# Altium PCB Feather_nRF53.PcbDoc
Units mm, origin at the board's own origin, x right, y up, seen from the top; angles counter-clockwise.
Board outline 22.88 x 50.82 mm, 2 copper layers (Top Layer, Bottom Layer), stack 1.569 mm thick; 6 components, 9 nets, 107 pads, 0 vias.
Unrouted connection lines stored in the file: 13.
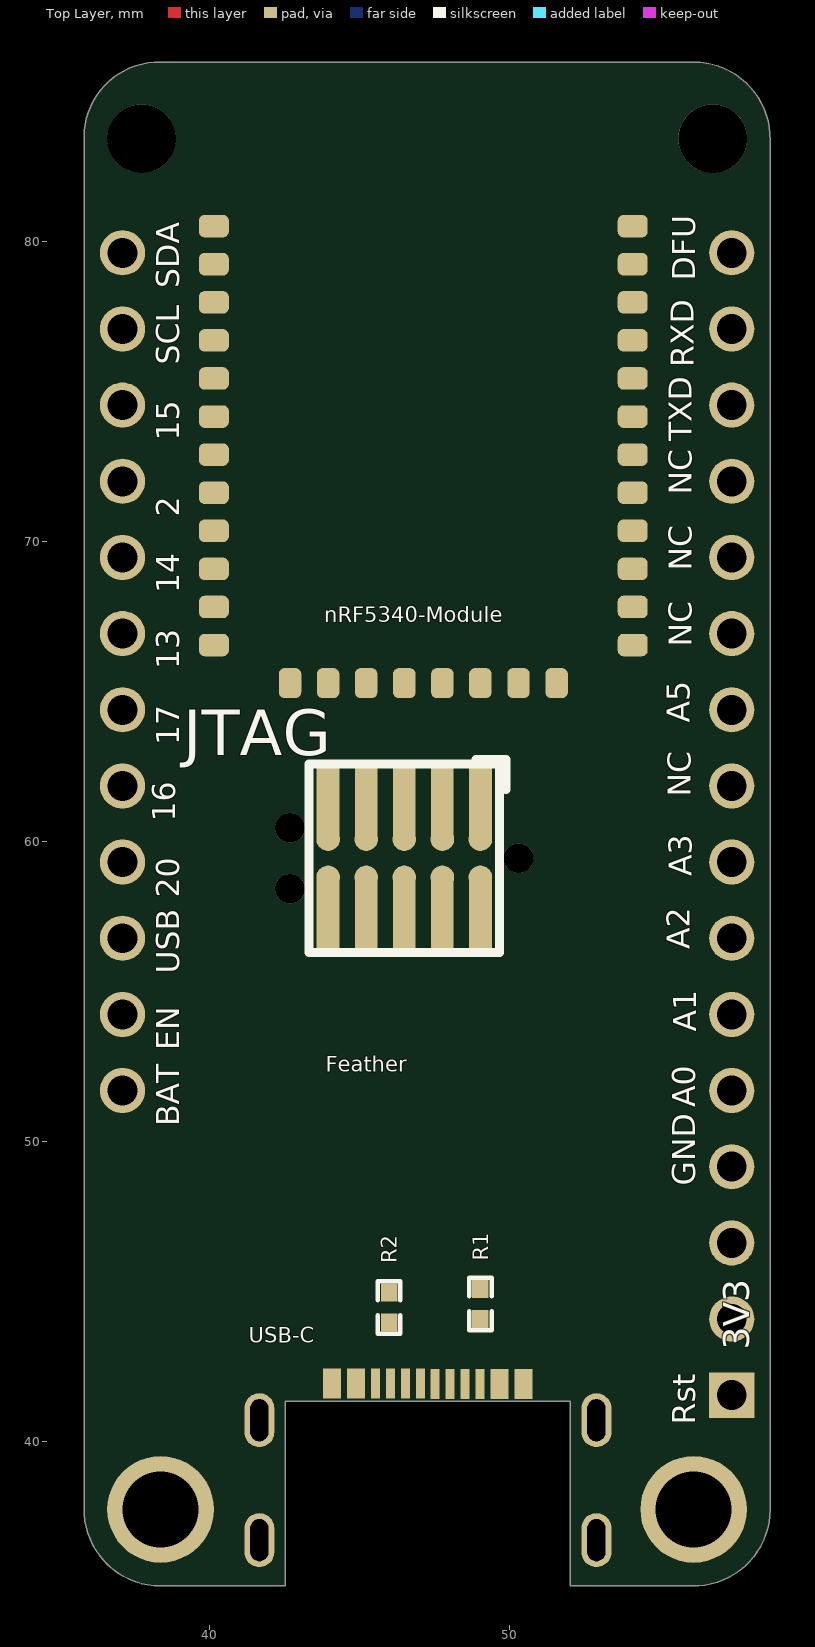
[diagram p0: Top Layer view]
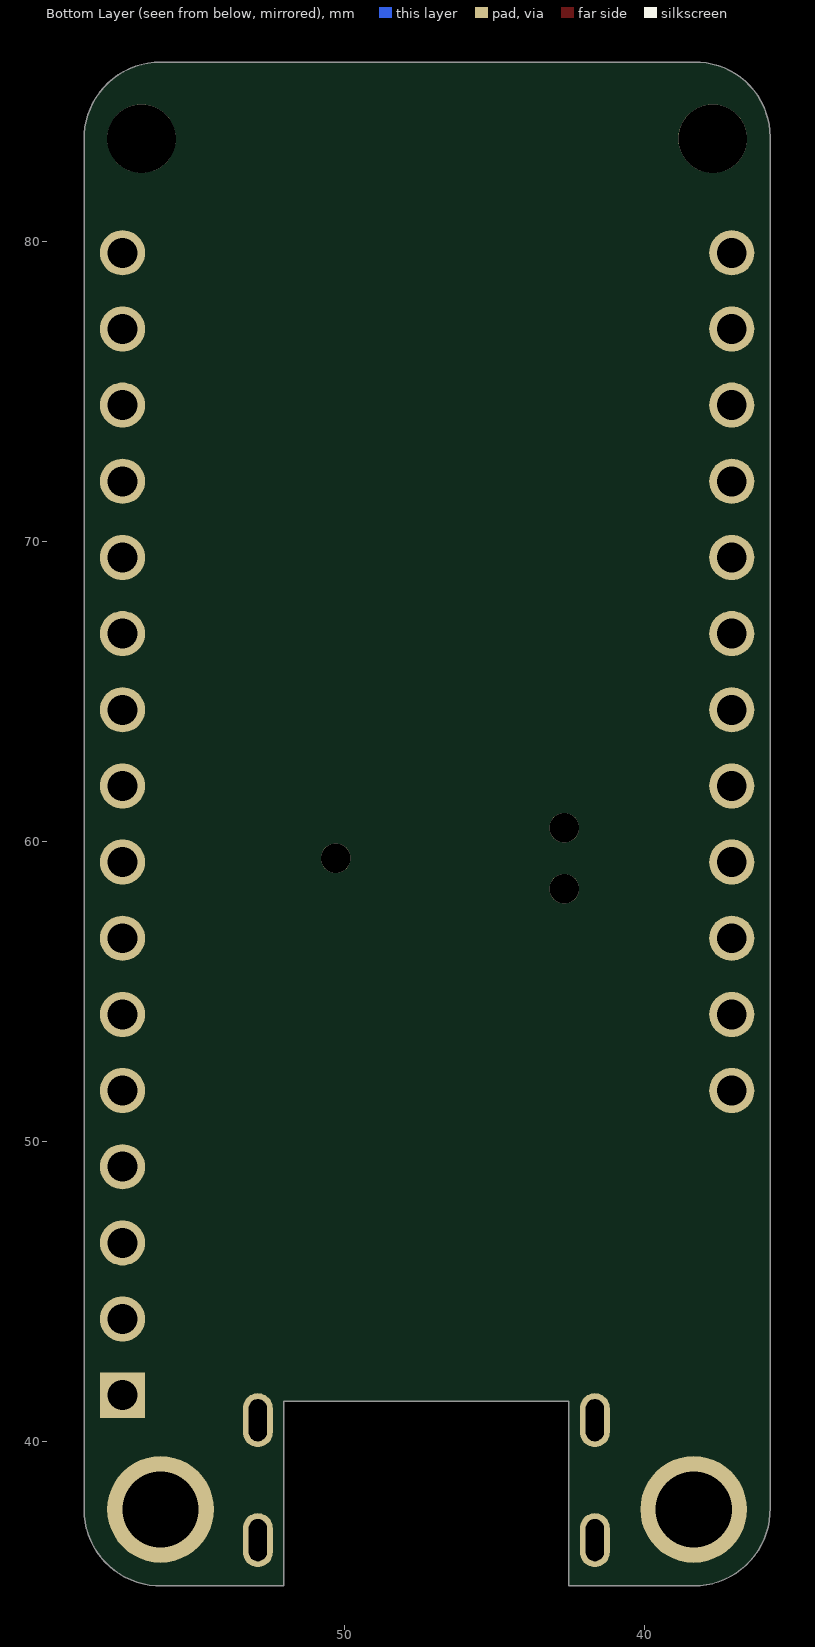
[diagram p1: Bottom Layer view, seen from below]

## Layer stack, top to bottom
Top Solder: solder mask 0.0254, SM-001, Dk 4
Top Layer: signal copper 0.035
Dielectric 1: core 1.4986, Core-043, Dk 4.3
Bottom Layer: signal copper 0.035
Bottom Solder: solder mask 0.0254, SM-001, Dk 4

## Board outline
35.804,37.77 35.804,83.49 cw(c38.304,83.49) 38.354,85.99 56.134,85.989 cw(c56.134,83.439) 58.684,83.388 58.684,37.719 cw(c56.134,37.719) 56.083,35.169 52.019,35.169 52.019,41.32 42.519,41.32 42.519,35.169 38.354,35.169 cw(c38.354,37.719)

## Design rules (kind name [scope] priority, off if disabled: settings)
Clearance Clearance_3 [InNet('NetC9_1')] p1 off: gap=0.4 ignorepadtopadclearanceinfootprint=TRUE
Clearance Clearance_2 [InNet('VIN')] p2 off: gap=0.8 ignorepadtopadclearanceinfootprint=TRUE
Clearance Clearance_1 [All] p3: gap=0.254 ignorepadtopadclearanceinfootprint=TRUE
Clearance [All] p4 off: gap=0.2 ignorepadtopadclearanceinfootprint=TRUE
ComponentClearance [All] p1 off: gap=0.254 collisioncheckmode=3 verticalgap=0.254 showdistances=FALSE
DiffPairsRouting [InDifferentialPair('DiffPair')] p1: maxlimit=0.254 minlimit=0.089 mostfreqgap=0.2 toplayer_minwidth=0.089 toplayer_maxwidth=0.381 toplayer_prefwidth=0.15 bottomlayer_minwidth=0.089 bottomlayer_maxwidth=0.381 bottomlayer_prefwidth=0.15 maxuncoupledlength=12.7
HoleSize [All] p1: absolutevalues=TRUE maxlimit=6 minlimit=0.025 maxpercent=80.000 minpercent=20.000
MatchedLengths usb [All] p1 off: tolerance=1 checknetsindiffpair=FALSE checkdiffpairvsdiffpair=TRUE checkxsignals=TRUE checkothers=TRUE
MinimumSolderMaskSliver [All] p1 off: minsoldermaskwidth=0.254
PlaneClearance [All] p1: clearance=0.254
PolygonConnect VIN [InNet('VIN')] p1: connectstyle=Direct reliefconductorwidth=0.254 reliefentries=4 polygonreliefangle="90 Angle" airgapwidth=0.254
PolygonConnect Connectors [HasFootprint('B06B-JWPF-SK-R')] p2: connectstyle=Direct reliefconductorwidth=0.254 reliefentries=4 polygonreliefangle="90 Angle" airgapwidth=0.254
PolygonConnect Connectors_1 [HasFootprint('B08B-JWPF-SK-R')] p3: connectstyle=Direct reliefconductorwidth=0.254 reliefentries=4 polygonreliefangle="90 Angle" airgapwidth=0.254
PolygonConnect Default [All] p4 off: connectstyle=Relief reliefconductorwidth=0.254 reliefentries=4 polygonreliefangle="90 Angle" airgapwidth=0.254
PolygonConnect vbus [InNet('NetQ1_1')] p5: connectstyle=Direct reliefconductorwidth=0.254 reliefentries=4 polygonreliefangle="90 Angle" airgapwidth=0.254
PolygonConnect vbus_1 [InNet('NetC9_1')] p6: connectstyle=Direct reliefconductorwidth=0.254 reliefentries=4 polygonreliefangle="90 Angle" airgapwidth=0.254
PolygonConnect VIAS [IsVia] p7: connectstyle=Direct reliefconductorwidth=0 reliefentries=4 polygonreliefangle="90 Angle" airgapwidth=0
PolygonConnect PolygonConnect_1 [All] p8: connectstyle=Relief reliefconductorwidth=0.254 reliefentries=4 polygonreliefangle="90 Angle" airgapwidth=0.254
RoutingVias [All] p1: holewidth=0.3 width=0.5 viastyle="Through Hole" minholewidth=0.25 minwidth=0.45 maxholewidth=6.3 maxwidth=1.27
SilkToSilkClearance [All] p1 off: silktosilkclearance=0.254
SilkToSolderMaskClearance [IsPad] p1 off: minsilkscreentomaskgap=0.254 clearancetoexposedcopper=TRUE
SolderMaskExpansion SolderMaskExpansion_1 [IsVia] p1: expansion=0.102 istentingtop=TRUE
SolderMaskExpansion [All] p2: expansion=0.102 istentingtop=FALSE
Width [All] p1: maxlimit=1 minlimit=0.127 preferedwidth=0.2
23 further rules are at their usual default settings.

## Components (designator, comment, footprint, x,y, rotation, side; value= is the part's Value field where it differs from the comment)
Feather "DNP" FEATHER 47.244,60.579 r90 top locked
JTAG "DNP" HDR_2x5-SMD-1.27mm-K_2 46.482,59.436 r180 top value="Pin Header 2x5, 1.27mm"
nRF5340-Module "nRF5340-Module" nRF53-Module 40.132,66.548 r0 top
R1 "5.1K" RES0402 49.022,44.577 r90 top value=0R
R2 "5.1K" RES0402 45.974,44.45 r90 top value=0R
USB-C "TYPE-C-31-M-12" 2340901-1 47.269,41.915 r0 top locked

## Footprints (in the part's own frame and the unit in brackets; to place one, negate y for a bottom-side part, rotate by r counter-clockwise, add the part's x,y. Pads: shape width x height; smd on the part's side, far side on the other; paste and mask are expansions set on the pad)
2340901-1 [mm] "Te Flush mounted USB-C"
  rect 0.6x1 smd: 1(-3.2,0) 1(3.187,-0.005) 2(-2.4,0) 2(2.387,-0.005)
  rect 0.3x1 smd: 3(-1.75,0) 4(-1.25,0) 5(-0.75,0) 6(-0.25,0) 7(0.237,-0.005) 8(0.737,-0.005) 9(1.237,-0.005) 10(1.737,-0.005)
  oval 1x1.8 hole 1.4 slot 0.6 at 0 deg: 11(-5.62,-5.22) 11(-5.62,-1.22) 11(5.62,-5.22) 11(5.62,-1.22)
  body extent -5.77,-7.4 5.77,0.15, height 1.58
FEATHER [mm] "Adafruit Feather footprint"
  rect 1.508x1.508 hole 1: 1(-19.05,-10.16)
  round 1.508 hole 1: 2(-16.51,-10.16) 3(-13.97,-10.16) 4(-11.43,-10.16) 5(-8.89,-10.16) 6(-6.35,-10.16) 7(-3.81,-10.16) 8(-1.27,-10.16) 9(1.27,-10.16) 10(3.81,-10.16) 11(6.35,-10.16) 12(8.89,-10.16) 13(11.43,-10.16) 14(13.97,-10.16) 15(16.51,-10.16) 16(19.05,-10.16) 17(-8.89,10.16) 18(-6.35,10.16) 19(-3.81,10.16) 20(-1.27,10.16) 21(1.27,10.16) 22(3.81,10.16) 23(6.35,10.16) 24(8.89,10.16) 25(11.43,10.16) 26(13.97,10.16) 27(16.51,10.16) 28(19.05,10.16)
  round 2.286 hole 2.286 unplated: None(22.86,-9.525) None(22.86,9.525)
  round 3.556 hole 2.54: S1(-22.86,-8.89) S2(-22.86,8.89)
HDR_2x5-SMD-1.27mm-K_2 [mil]
  round 39 hole 39 unplated: 0(-150,0) 0(150,-40) 0(150,40)
  rect 29.92x94.49 smd: 1(-100,-76.77) 2(-100,76.77) 3(-50,-76.77) 4(-50,76.77) 5(0,-76.77) 6(0,76.77) 7(50,-76.77) 8(50,76.77) 9(100,-76.77) 10(100,76.77)
  round 31 smd paste-196.85: 1(-100,-25) 2(-100,25) 3(-50,-25) 4(-50,25) 5(0,-25) 6(0,25) 7(50,-25) 8(50,25) 9(100,-25) 10(100,25)
  Top Layer pour cut-out: -100,25 -100,-25 100,-25 100,25
  silkscreen extent -134,-130 125,124, body extent -124,-115 124,115, height 241
nRF53-Module [mm] "Hand Solder version"
  rrect50% 1x0.75 smd: 1(0,13.97) 2(0,12.7) 3(0,11.43) 4(0,10.16) 5(0,8.89) 6(0,7.62) 7(0,6.35) 8(0,5.08) 9(0,3.81) 10(0,2.54) 11(0,1.27) 12(0,0) 13(13.97,0) 14(13.97,1.27) 15(13.97,2.54) 16(13.97,3.81) 17(13.97,5.08) 18(13.97,6.35) 19(13.97,7.62) 20(13.97,8.89) 21(13.97,10.16) 22(13.97,11.43) 23(13.97,12.7) 24(13.97,13.97)
  rrect50% 0.75x1 smd: 25(3.81,-1.27) 26(2.54,-1.27) 27(5.08,-1.27) 28(6.35,-1.27) 29(7.62,-1.27) 30(8.89,-1.27) 31(10.16,-1.27) 32(11.43,-1.27)
RES0402 [mm]
  rect 0.6x0.55 smd: 1(-0.5,0) 2(0.5,0)
  silkscreen extent -0.87,-0.38 0.88,0.38, body extent -0.5,-0.25 0.5,0.25, height 0.3

## Part data
Feather: library part "Adafruit Feather", "Adafruit Feather Footprint", Package=None, Availability=Unavailable, MF="Adafruit Industries", MP=2821, Price=None, SnapEDA_Link=https://www.snapeda.com/parts/2821/Adafruit%20Industries%20LLC/view-part/?ref=snap
JTAG: "Pin Header 2x5, 1.27mm (50mil), SMD, Keying Shroud", Manufacturer=W-CON, Manufacturer Part Number=3132-10MS0BK00R1, Part Number="Pin Header 2x5 SMD, 1.27mm, KS", Part number IPS=N.A., Artikkelnr Noca=55010009, ComponentLink1Description=Datasheet, ComponentLink2Description="Supplier link", Footprint Doc=HDR_2x5-SMD-1.27mm, HelpURL=\\hizz\pro\app9717\Datasheet\connectores\W-CON\3132-XXMXXBK00XX.pdf, LatestRevisionDate=2016-04-21, Pin Count=10, Published=2016-01-22, Publisher="Nordic Semiconductor", Supplier 1=Cabcon, Supplier 2=Samtec, Supplier Part Number 1=3132-10MS0BK00R1, Supplier Part Number 2=FTSH-105-01-F-DV-K
nRF5340-Module: "nRF5340-Module Available on https://www.hackster.io/kattemjau"
R1 R2: "Resistor, ±5%, 0.05W", Part Number=R0201-0R, Part number IPS=00000003245, Artikkelnr Noca=N.A., ComponentLink1Description=Datasheet, ComponentLink2Description="Supplier link", Footprint Doc=0201, LatestRevisionDate=2017-11-09, Note="Chip Res 5%", Pin Count=2, Published=2014-11-13, Publisher="Nordic Semiconductor"
USB-C: library part "USB-C 2.0", "USB C connector", ComponentLink1Description=LCSC, ComponentLink1URL=https://lcsc.com/product-detail/USB-Connectors_Korean-Hroparts-Elec-TYPE-C-31-M-12_C165948.html

## Nets (pads, with @x,y where several pads share a name; then routed paths per layer and width w, separated by ;. In a path a pad name is that pad's centre, name@x,y a point inside that pad or via, vN(x,y) a via of type N, cw(c..) or ccw(c..) an arc to the next point about the centre after c; other vN are vias at no path point)
3V3: JTAG.1
GND: JTAG.3 JTAG.5 JTAG.9 R1.2 R2.2 USB-C.1 USB-C.11
NetLabel160: JTAG.2
NetLabel161: JTAG.4
NetLabel162: JTAG.6
NetLabel163: JTAG.10
NetR1_1: R1.1 USB-C.10
NetR2_1: R2.1 USB-C.4
VIN: USB-C.2
pads on no net: Feather.1 Feather.2 Feather.3 Feather.4 Feather.5 Feather.6 Feather.7 Feather.8 Feather.9 Feather.10 Feather.11 Feather.12 Feather.13 Feather.14 Feather.15 Feather.16 Feather.17 Feather.18 Feather.19 Feather.20 Feather.21 Feather.22 Feather.23 Feather.24 Feather.25 Feather.26 Feather.27 Feather.28 Feather.None Feather.S1 Feather.S2 JTAG.0 JTAG.7 JTAG.8 nRF5340-Module.1 nRF5340-Module.2 nRF5340-Module.3 nRF5340-Module.4 nRF5340-Module.5 nRF5340-Module.6 nRF5340-Module.7 nRF5340-Module.8 nRF5340-Module.9 nRF5340-Module.10 nRF5340-Module.11 nRF5340-Module.12 nRF5340-Module.13 nRF5340-Module.14 nRF5340-Module.15 nRF5340-Module.16 nRF5340-Module.17 nRF5340-Module.18 nRF5340-Module.19 nRF5340-Module.20 nRF5340-Module.21 nRF5340-Module.22 nRF5340-Module.23 nRF5340-Module.24 nRF5340-Module.25 nRF5340-Module.26 nRF5340-Module.27 nRF5340-Module.28 nRF5340-Module.29 nRF5340-Module.30 nRF5340-Module.31 nRF5340-Module.32 USB-C.3 USB-C.5 USB-C.6 USB-C.7 USB-C.8 USB-C.9

## Silkscreen, mask and mechanical layers (free items; w line width, h text height)
Mechanical 1:
  lines w0.2: 38.354,35.169 42.535,35.169 ; 42.519,35.169 42.519,41.32 52.019,41.32 52.019,35.169 ; 52.08,35.169 56.083,35.169
  lines w0.254: 38.354,35.169 cw(c38.354,37.719) 35.804,37.77 35.804,83.49 cw(c38.304,83.49) 38.354,85.99 56.134,85.989 cw(c56.134,83.439) 58.684,83.388 ; 56.083,35.169 ccw(c56.134,37.719) 58.684,37.719 58.684,83.387

## Text inside footprints (layer, text, board x,y; h text height)
Feather: Top Overlay "DFU" at 56.194,78.695 h0.76 r90; Top Overlay "RXD" at 56.134,75.819 h0.76 r90; Top Overlay "TXD" at 56.076,73.348 h0.76 r90; Top Overlay "NC" at 56.076,66.484 h0.76 r90; Top Overlay "A5" at 56.011,63.948 h0.76 r90; Top Overlay "NC" at 56.037,61.49 h0.76 r90; Top Overlay "A3" at 56.063,58.836 h0.76 r90; Top Overlay "A2" at 55.997,56.405 h0.76 r90; Top Overlay "A1" at 56.22,53.646 h0.76 r90; Top Overlay "A0" at 56.181,51.136 h0.76 r90; Top Overlay "GND" at 56.181,48.521 h0.76 r90; Top Overlay "Rst" at 56.193,40.546 h0.76 r90; Top Overlay "SDA" at 38.977,78.441 h0.76 r90; Top Overlay "SCL" at 38.977,75.901 h0.76 r90; Top Overlay "15" at 38.977,73.361 h0.76 r90; Top Overlay "2" at 38.977,70.821 h0.76 r90; Top Overlay "14" at 38.977,68.281 h0.76 r90; Top Overlay "13" at 38.977,65.741 h0.76 r90; Top Overlay "17" at 38.977,63.201 h0.76 r90; Top Overlay "16" at 38.85,60.661 h0.76 r90; Top Overlay "20" at 38.977,58.121 h0.76 r90; Top Overlay "USB" at 38.977,55.581 h0.76 r90; Top Overlay "EN" at 38.977,53.041 h0.76 r90; Top Overlay "3V3" at 58.293,43.053 h1.5 r90; Top Overlay "BAT" at 38.977,50.501 h0.76 r90; Top Overlay "NC" at 56.076,69.024 h0.76 r90; Top Overlay "NC" at 56.076,71.564 h0.76 r90